# Altium PCB Volta-Interface.PcbDoc (part 2 of 2)
Units mm, origin at the board's own origin, x right, y up, seen from the top; angles counter-clockwise.
Board outline 90 x 25.5 mm, 4 copper layers (Top Layer, PWR, GND, Bottom Layer), stack 0.97 mm thick; 63 components, 43 nets, 229 pads, 83 vias.
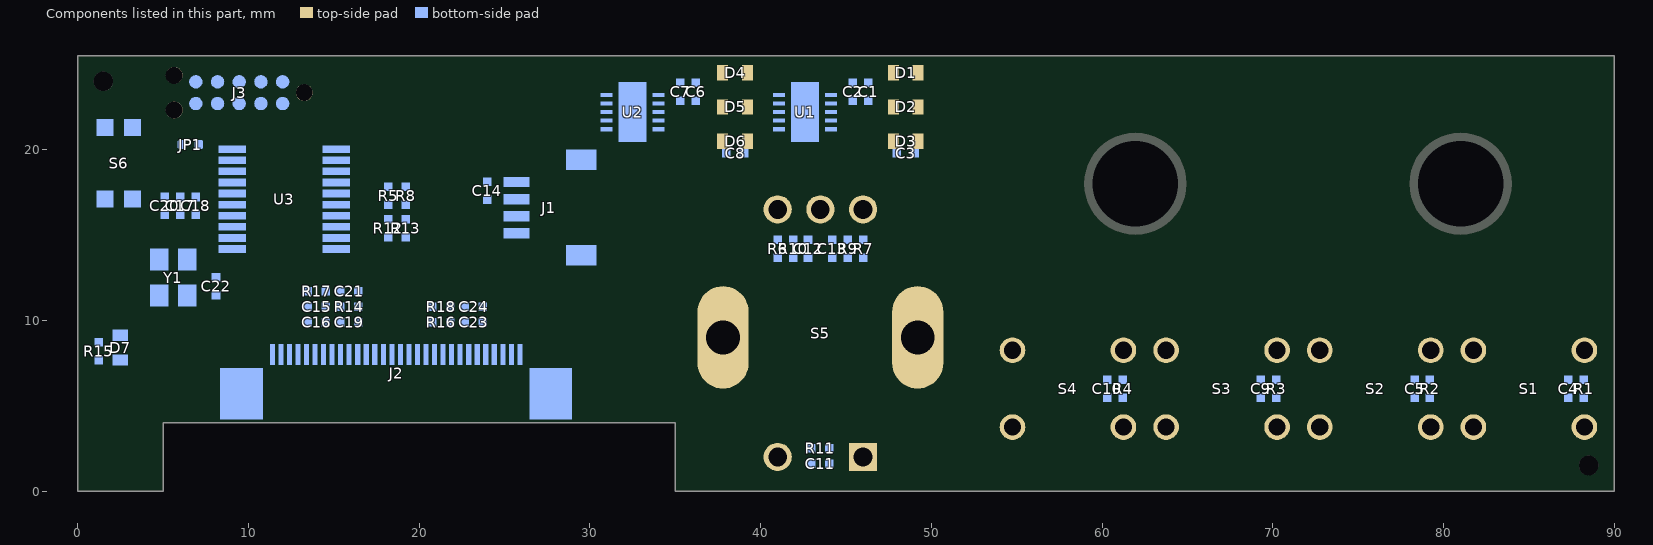
[diagram p4: the components of this part, seen from the top]

## Silkscreen, mask and mechanical layers (free items; w line width, h text height) (continued)
PCB_SHEET1:
  drawing of 845 lines, arcs and shapes, not listed
  text "SH" at 401.173,299.927 h2.54
  text "DWG NO" at 326.021,299.513 h2.54
  text "DWG NO" at 326.021,299.518 h2.54
  text ".DocNumberPCB" at 342.672,296.672 h3.05
  text "2" at -196.323,296.184 h5.08
  text "4" at 19.75,296.184 h5.08
  text "8" at 444.108,296.184 h5.08
  text "1" at -304.051,296.024 h5.08
  text "3" at -88.329,296.024 h5.08
  text "5" at 127.749,296.024 h5.08
  text "6" at 235.696,296.024 h5.08
  text "1" at 406.172,295.656 h3.05
  text "REVISION HISTORY" at 352.324,289.278 h2.54
  text "REV" at 327.94,283.21 h2.54
  text "DESCRIPTION" at 373.66,283.21 h2.54
  text "DATE" at 432.08,283.21 h2.54
  text "APPROVED" at 462.56,283.21 h2.54
  text "11" at 30.76,279.4 h5.08
  text "5" at 40.412,279.4 h5.08
  text ".Hist1Rev" at 328.845,278.61 h2.54
  text "LAYER STACKUP:" at 50.572,278.13 h10.16
  text ".Hist1Desc" at 340.64,278.13 h2.54
  text ".Hist1Date" at 424.46,278.13 h2.54
  text ".Hist1Appr" at 454.94,278.13 h2.54
  text "NOTES" at -317.22,276.86 h10.16
  text ".Hist2Rev" at 328.845,273.047 h2.54
  text ".Hist2Desc" at 340.64,272.567 h2.54
  text ".Hist2Date" at 424.46,272.567 h2.54
  text ".Hist2Appr" at 454.94,272.567 h2.54
  text "1. UNLESS OTHERWISE SPECIFIED, DIMENSIONS, TOLERANCES, AND SURFACE TEXTURE APPLY" at -317.22,269.24 h5.08
  text "Layer" at 30.752,268.694 h1.52
  text "Name" at 41.266,268.694 h1.52
  text "Material" at 64.983,268.694 h1.52
  text "Thickness" at 86.922,268.694 h1.52
  text "Constant" at 103.53,268.694 h1.52
  text "Board Layer Stack" at 118.106,268.694 h1.52
  text ".Hist3Rev" at 328.845,267.434 h2.54
  text ".Hist3Desc" at 340.64,266.954 h2.54
  text ".Hist3Date" at 424.46,266.954 h2.54
  text ".Hist3Appr" at 454.94,266.954 h2.54
  text "1" at 30.752,265.646 h1.52
  text "Top Overlay" at 41.266,265.646 h1.52
  text "2" at 30.752,262.598 h1.52
  text "Top Solder" at 41.266,262.598 h1.52
  text "Solder Resist" at 64.983,262.598 h1.52
  text "0.40mil" at 86.922,262.598 h1.52
  text "3.5" at 103.53,262.598 h1.52
  text "AFTER PLATING OR CHEMICAL FILM TREATMENTS, AND PRIOR TO ORGANIC COATINGS." at -312.14,261.62 h5.08
  text "3" at 30.752,259.55 h1.52
  text "Top Layer" at 41.266,259.55 h1.52
  text "Copper" at 64.983,259.55 h1.52
  text "1.40mil" at 86.922,259.55 h1.52
  text "4" at 30.752,256.502 h1.52
  text "Prepreg" at 41.266,256.502 h1.52
  text "FR-4" at 64.983,256.502 h1.52
  text "9.00mil" at 86.922,256.502 h1.52
  text "4.2" at 103.53,256.502 h1.52
  text "2. DIMENSIONING AND TOLERANCING PER ASME Y14.5M-1994" at -317.22,254 h5.08
  text "5" at 30.752,253.454 h1.52
  text "PWR" at 41.266,253.454 h1.52
  text "Copper" at 64.983,253.454 h1.52
  text "0.70mil" at 86.922,253.454 h1.52
  text "6" at 30.752,250.406 h1.52
  text "Core" at 41.266,250.406 h1.52
  text "FR-$" at 64.983,250.406 h1.52
  text "16.00mil" at 86.922,250.406 h1.52
  text "4.2" at 103.53,250.406 h1.52
  text "7" at 30.752,247.358 h1.52
  text "GND" at 41.266,247.358 h1.52
  text "Copper" at 64.983,247.358 h1.52
  text "0.70mil" at 86.922,247.358 h1.52
  text "3. PARTS SHALL BE FREE OF BURRS AND SHARP EDGES. BREAK SHARP EDGES .005\" MAX" at -317.22,246.38 h5.08
  text "8" at 30.752,244.31 h1.52
  text "Prepreg" at 41.266,244.31 h1.52
  text "FR-4" at 64.983,244.31 h1.52
  text "9.00mil" at 86.922,244.31 h1.52
  text "4.2" at 103.53,244.31 h1.52
  text "9" at 30.752,241.262 h1.52
  text "Bottom Layer" at 41.266,241.262 h1.52
  text "Copper" at 64.983,241.262 h1.52
  text "1.40mil" at 86.922,241.262 h1.52
  text "4. UNLESS OTHERWISE SPECIFIED, BOARD SHALL MEET THE REQUIREMENTS OF IPC-6011" at -317.22,238.76 h5.08
  text "10" at 30.752,238.214 h1.52
  text "Bottom Solder" at 41.266,238.214 h1.52
  text "Solder Resist" at 64.983,238.214 h1.52
  text "0.40mil" at 86.922,238.214 h1.52
  text "3.5" at 103.53,238.214 h1.52
  text "11" at 30.752,235.166 h1.52
  text "Bottom Overlay" at 41.266,235.166 h1.52
  text "A" at -346.12,232.519 h5.08
  text "A" at 492.167,232.519 h5.08
  text "CLASS 2, AND IPC-6012, TYPE 2." at -312.14,231.14 h5.08
  text "OVERALL HEIGHT = 0.xxx +/- 10%" at 22.759,226.574 h5.08
  text "5. MATERIAL: POLYCLAD 370HR OR EQUIVALENT IAW IPC-4101. THIS BOARD IS INTENDED FOR LEAD-FREE" at -317.22,223.52 h5.08
  text "TOP AND BOTTOM LAYER COPPER THICKNESS SPECIFIED AFTER PLATING" at 22.759,219.583 h5.08
  text "ASSEMBLY (RoHS COMPLIANT). FLAMMABILITY RATING OF 94V-0 OR BETTER REQUIRED. BOARD MUST BE UL" at -312.14,215.9 h5.08
  text "RECOGNIZED AND VENDOR SHALL AFFIX UL LISTING DESIGNATION ON PRINTED CIRCUIT BOARD." at -312.14,208.28 h5.08
  text "A. BASE LAMINATE: WOVEN GLASS BASED EPOXY RESIN." at -312.14,200.66 h5.08
  text "SEE STACK DETAIL FOR COPPER WEIGHT, SUBSTRATES, AND FINISHED BOARD THICKNESS" at -305.79,193.04 h5.08
  text "B. BONDING AGENT: PREIMPREGNATED B-STAGE EPOXY CLOTH (GF)" at -312.14,185.42 h5.08
  text "C. FINISH TO BE DONE USING IMMERSION GOLD (ENIG) 3-6 MICROINCHES OVER NICKEL 100 MICROINCHES MIN." at -312.14,177.8 h5.08
  text "FULL BODY IMMERSION GOLD ACCEPTED." at -305.79,170.18 h5.08
  text "D. SILKSCREEN TO BE DONE USING NON-CONDUCTIVE WHITE EPOXY INK. VENDOR MAY VIA CAP OR PLUG VIAS" at -312.14,162.56 h5.08
  text "BEFORE FINAL SOLDERMASK TO AVOID TRIMMING OF SILKSCREEN. SILKSCREEN INK NOT ALLOWED ON ANY" at -305.79,154.94 h5.08
  text "EXPOSED ETCH. VENDOR TO DETERMINE BEST PROCESS TO ENSURE THIS." at -305.79,147.32 h5.08
  text "E. SOLDERMASK OVER BARE COPPER FOLLOWED BY PLATING PER LAYER STACKUP." at -312.14,139.7 h5.08
  text "SOLDERMASK IS TO BE FREE OF SHADED AREAS, AND IS TO BE BLACK, TYPE B1, CLASS 2, IAW IPC-SM-840." at -305.79,132.08 h5.08
  text "6. FINAL TRACES WIDTHS AND LAND SIZES REPRESENTED BY ARTWORK. THE FINAL" at -317.22,124.46 h5.08
  text "CONDUCTOR WIDTH SHALL BE +/- 0.001\" OF THE ORIGINAL ARTWORK TRACE. THE PCB" at -312.14,116.84 h5.08
  text "MANUFACTURER IS DIRECTED TO INFLATE FEATURES IN THE SUPPLIED GERBER FILES, AS" at -312.14,109.22 h5.08
  text "NECESSARY, TO COMPENSATE FOR THE ETCHBACK IN THE PCB MANUFACTURER'S PROCESS." at -312.14,101.6 h5.08
  text "7. MANUFACTURER TO INSERT COMPANY LOGO AND DATE CODE IN BOTTOM SILKSCREEN," at -317.855,93.98 h5.08
  text "B" at -346.17,92.66 h5.08
  text "B" at 492.117,92.66 h5.08
  text "USING PREFERRED METHOD (NON-CONDUCTIVE)." at -312.14,86.36 h5.08
  text "8. UNLESS OTHERWISE SPECIFIED:" at -317.855,78.74 h5.08
  text "A. ALL HOLES TO BE CONCENTRIC WITH PAD CENTER WITHIN +/- 0.005\"." at -312.14,71.12 h5.08
  text "B. ALL HOLE DIAMETERS TO BE WITHIN +/- 0.003\" OF SPECIFIED DIAMETER." at -312.14,63.5 h5.08
  text "C. PLATED THROUGH HOLE DIAMETERS SPECIFIED AFTER PLATING." at -312.14,55.88 h5.08
  text "9. FABRICATE AND TEST BOARD, TYPE 2, CLASS 1, LEVEL A, PER IPC-D-275. VENDOR MUST USE IPC D 356 NETLIST" at -317.22,48.26 h5.08
  text "PROVIDED PRIOR TO BOARD FABRICATION AND REPORT ANY DISCREPANCIES WHEN COMPARED WITH THE GERBERS." at -312.14,40.64 h5.08
  text "10. INFORMATION IN PARENTHESIS IS FOR REFERENCE ONLY." at -317.22,33.02 h5.08
  text "11. MAINTAIN CONTROLLED IMPEDANCES:" at -317.517,24.676 h5.08
  text "A. HS-USB - Bottom Layer differential pair; 90 ohms differential impedance; Length differences < 25 mils" at -312.602,17.746 h5.08
  text "Trace Width = 15.0mils; Inside Gap = 6.3mils. (Microstrip Differential Pair)" at -306.431,10.445 h5.08
  text "12. VENDOR IS ALLOWED TO DO THE FOLLOWING:" at -318.198,2.304 h5.08
  text "A. FOLLOW BOARD OUTLINE FOR SIZE OF BOARD." at -312.602,-5.227 h5.08
  text "B. REMOVE INTERNAL NON FUNCTIONAL PADS." at -312.602,-12.758 h5.08
  text "C. ADD TEAR DROPPING" at -312.602,-20.289 h5.08
  text "D. REMOVE SOLDERMASK SLIVERS LESS THAN 0.003 TO ENHANCE PRODUCABILITY." at -312.602,-27.82 h5.08
  text "Scale  3:1" at 269.36,-41.12 h12.7
  text "C" at -345.585,-46.814 h5.08
  text "C" at 492.701,-46.814 h5.08
  text "DFTG" at 264.44,-174.526 h2.54
  text ".NameDftg" at 277.648,-174.526 h2.54
  text ".DateDftg" at 317.272,-174.526 h2.54
  text "UNLESS OTHERWISE SPECIFIED," at 209.576,-178.844 h2.03
  text "MATERIAL:" at 146.406,-179.07 h2.54
  text "ENG" at 264.44,-181.13 h2.54
  text ".NameEng" at 277.648,-181.13 h2.54
  text ".DateEng" at 317.272,-181.13 h2.54
  text "INCHES" at 245.644,-182.372 h2.03
  text "DIMENSIONS ARE IN" at 209.576,-182.4 h2.03
  text "D" at -345.838,-186.513 h5.08
  text "D" at 492.449,-186.513 h5.08
  text "MECH" at 264.44,-186.718 h2.54
  text "*" at 277.648,-187.226 h2.54
  text "*" at 317.272,-187.226 h2.54
  text "TITLE:" at 356.25,-189.258 h2.54
  text "TOLERANCES:" at 209.576,-190.274 h2.54
  text "SEE NOTES" at 148.235,-192.278 h2.54
  text "MFG" at 264.44,-193.322 h2.54
  text "*" at 277.648,-193.322 h2.54
  text "*" at 317.272,-193.83 h2.54
  text ".X +/- 0.1" at 210.592,-194.841 h2.54
  text ".XX +/- 0.01" at 210.592,-197.889 h2.54
  text ".TitlePCB" at 362.738,-198.12 h5.59
  text ".XXX +/- 0.005" at 210.592,-200.937 h2.54
  text ".Title0" at 382.46,-207.93 h5.59
  text "THIRD ANGLE PROJECTION" at 147.854,-212.496 h2.54
  text "ALL SHEETS ARE THE" at 214.148,-216.594 h2.54
  text ".Title1" at 367.31,-217.17 h5.59
  text "SAME REVISION STATUS" at 211.799,-221.166 h2.54
  text "SIZE" at 356.388,-224.31 h2.54
  text "DRAWING NUMBER" at 366.04,-224.31 h2.54
  text "REV" at 473.112,-225.861 h3.05
  text "D" at 356.43,-232.151 h5.08
  text ".DocNumberPCB" at 366.04,-232.41 h6.6
  text ".Rev" at 472.72,-232.41 h5.08
  text "1" at 457.48,-237.49 h2.54
  text "1" at 472.72,-237.49 h2.54
  text "1:1" at 369.85,-237.744 h2.54
  text "SCALE" at 355.824,-237.919 h2.54
  text "SHEET   OF" at 441.731,-238.134 h2.54
  text "8" at 449.606,-248.666 h5.08
  text "1" at -303.885,-248.92 h5.08
  text "2" at -196.323,-249.914 h5.08
  text "4" at 19.75,-249.914 h5.08
  text "3" at -88.329,-250.073 h5.08
  text "5" at 127.749,-250.073 h5.08
  text "6" at 235.696,-250.073 h5.08
  text "7" at 343.67,-250.073 h5.08
PCB_SHEET2:
  lines w0.198: -327.242,282.708 -167.527,282.708 ; -327.242,287.788 -167.527,287.788 ; -294.146,282.835 -294.141,293.373 ; -261.507,282.327 -261.507,293.376 ; -180.227,276.993 -180.227,293.376 ; -352.78,-252.527 -352.78,306.076 ; -352.78,-252.527 510.653,-252.527 ; -352.78,-252.527 510.653,-252.527 ; -352.78,-252.527 -352.78,306.076 ; -352.78,306.076 510.653,306.076 ; -352.78,306.076 510.653,306.076 ; 510.653,-252.527 510.653,306.076 ; 510.653,-252.527 510.653,306.076
  lines w0.599: -346.612,-106.677 -327.562,-106.677 ; -346.612,166.372 -327.562,166.372 ; -327.562,293.371 -327.562,-240.027 ; -327.562,-220.977 -197.514,-220.977 ; -312.551,-233.677 -312.551,-220.977 ; -283.112,-240.027 -283.112,-233.677 ; -245.012,-249.552 -245.012,-240.027 ; -197.515,-239.897 -197.515,-221.358 ; -167.649,276.358 -167.649,293.373 ; -137.063,-249.552 -137.063,-240.027 ; -137.063,293.371 -137.063,302.896 ; -29.113,-249.552 -29.113,-240.027 ; -29.113,293.371 -29.113,302.896 ; 186.787,-249.552 186.787,-240.027 ; 186.787,293.371 186.787,302.896 ; 294.737,-249.552 294.737,-240.027 ; 402.686,-249.552 402.686,-240.027 ; 402.686,293.371 402.686,302.896 ; 485.236,166.372 504.286,166.372 ; 485.236,293.373 -327.575,293.373 ; 485.871,-106.677 504.921,-106.677 ; -327.575,293.373 -327.575,272.896 -327.575,293.373 ; -327.562,-240.027 485.236,-240.027 ; -327.562,-240.027 485.236,-240.027 ; -327.562,-240.027 485.236,-240.027 ; -327.562,-240.027 485.236,-240.027 ; -327.562,-233.677 -197.514,-233.677 ; -327.562,-233.677 -197.514,-233.677 ; -327.562,-233.677 -197.514,-233.677 ; -327.562,-233.677 -197.514,-233.677 ; -255.172,293.371 -255.172,303.023 ; -255.172,293.371 -255.172,303.023 ; -255.172,293.371 -255.172,303.023 ; -255.172,293.371 -255.172,303.023 ; -255.172,293.371 -255.172,303.023 ; -255.172,293.371 -255.172,303.023 ; -255.172,293.371 -255.172,303.023 ; -255.172,293.371 -255.172,303.023 ; -255.172,303.023 -167.629,303.023 ; -255.172,303.023 -172.622,303.023 -255.172,303.023 ; -255.172,303.023 -167.629,303.023 ; -242.472,293.371 -242.472,303.023 ; -242.472,293.371 -242.472,303.023 ; -242.472,293.371 -242.472,303.023 ; -242.472,293.371 -242.472,303.023 ; -167.629,303.023 -167.629,293.371 -167.629,303.023 ; 294.737,293.371 294.737,302.896 ; 294.737,293.371 294.737,302.896 ; 294.737,293.371 294.737,302.896 ; 294.737,293.371 294.737,302.896 ; 485.236,-240.027 485.236,285.548 485.236,-240.027 ; 485.236,-240.027 485.236,293.371 ; 485.236,-240.027 485.236,293.371 ; 485.236,-240.027 485.236,293.371 ; -337.722,25.91 -337.722,27.434 -332.642,27.434 -332.642,29.212 -327.562,26.672 -332.642,24.132 -332.642,25.91 -337.722,25.91 ; 76.297,-245.107 78.837,-240.027 81.377,-245.107 79.599,-245.107 79.599,-250.187 78.075,-250.187 78.075,-245.107 76.297,-245.107 ; 76.297,298.451 78.837,293.371 81.377,298.451 79.599,298.451 79.599,303.53 78.075,303.53 78.075,298.451 76.297,298.451 ; 485.236,26.672 490.316,24.132 490.316,25.91 495.396,25.91 495.396,27.434 490.316,27.434 490.316,29.212 485.236,26.672
  text "SH" at -243.3,299.933 h2.54
  text "DWG NO" at -168.148,299.518 h2.54
  text ".DocNumberPCB" at -184.799,296.678 h3.05
  text "8" at -286.235,296.19 h5.08
  text "4" at 138.123,296.19 h5.08
  text "2" at 354.196,296.19 h5.08
  text "6" at -77.823,296.03 h5.08
  text "5" at 30.124,296.03 h5.08
  text "3" at 246.202,296.03 h5.08
  text "3" at 246.202,296.03 h5.08
  text "1" at 461.924,296.03 h5.08
  text "1" at -248.299,295.662 h3.05
  text "REVISION HISTORY" at -194.451,289.283 h2.54
  text "APPROVED" at -304.687,283.216 h2.54
  text "DATE" at -274.207,283.216 h2.54
  text "DESCRIPTION" at -215.787,283.216 h2.54
  text "REV" at -170.067,283.216 h2.54
  text "SEE SHEET 1" at -182.767,278.136 h2.54
  text "A" at -334.294,232.525 h5.08
  text "A" at 503.993,232.525 h5.08
  text "B" at -334.244,92.665 h5.08
  text "B" at 504.043,92.665 h5.08
  text "Scale  3:1" at 317.033,-41.16 h12.7
  text "C" at -334.828,-46.808 h5.08
  text "C" at 503.458,-46.808 h5.08
  text "D" at -334.576,-186.507 h5.08
  text "D" at 503.711,-186.507 h5.08
  text "REV" at -315.239,-225.855 h3.05
  text ".DocNumberPCB" at -203.722,-231.134 h5.08
  text ".Rev" at -314.847,-232.404 h5.08
  text "2" at -314.847,-237.484 h2.54
  text "SHEET 2 OF" at -283.858,-238.128 h2.54
  text "8" at -291.733,-248.66 h5.08
  text "1" at 461.925,-248.914 h5.08
  text "4" at 138.123,-249.908 h5.08
  text "2" at 354.196,-249.908 h5.08
  text "7" at -185.797,-250.068 h5.08
  text "6" at -77.823,-250.068 h5.08
  text "5" at 30.124,-250.068 h5.08
  text "3" at 246.202,-250.068 h5.08
Mechanical 34:
  circle w0.254: c43.502,9 r10

## Dimensions
35,0 to 5,0 on ASSY_TOP
90,0 to 0,0 on ASSY_TOP
0,25.5 to 0,0 on ASSY_TOP

## Panel: embedded boards
"Volta-Interface.PcbDoc" at 127,-31, 1 rows x 1 columns, spacing 63.5 x 38.1, rotation 0

## Text inside footprints (layer, text, board x,y; h text height)
Y1: Bottom Overlay "o" at 3.517,9.731 h0.25 r270